# Altium PCB PCB2.PcbDoc
Units mil, origin at the board's own origin, x right, y up, seen from the top; angles counter-clockwise.
Board outline 1574.8 x 1181.1 mil, 6 copper layers (Component Side, Ground Plane (GND), Inner Layer 1, Inner Layer 2, Power Plane (VCC), Solder Side), stack 51.068 mil thick; 48 components, 39 nets, 169 pads, 0 vias.
Unrouted connection lines stored in the file: 114.
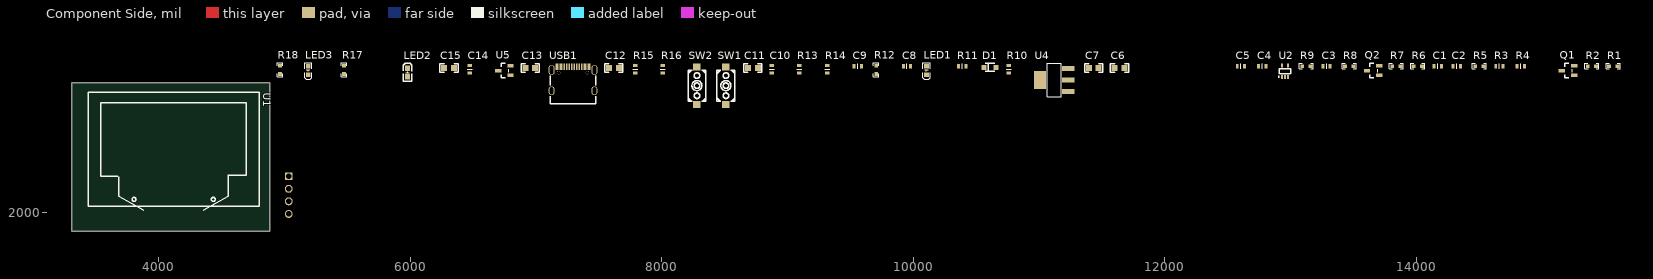
[diagram p0: Component Side view]
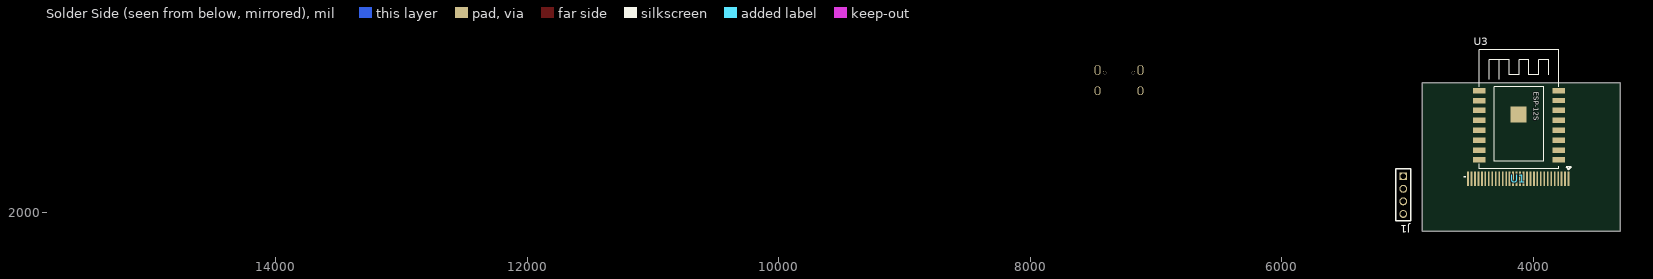
[diagram p1: Solder Side view, seen from below]
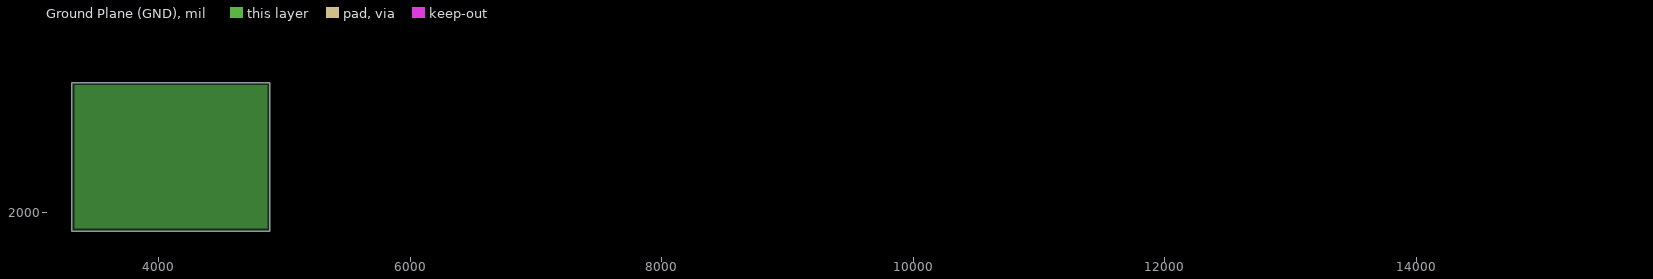
[diagram p2: Ground Plane (GND), clearances drawn from the general rule]
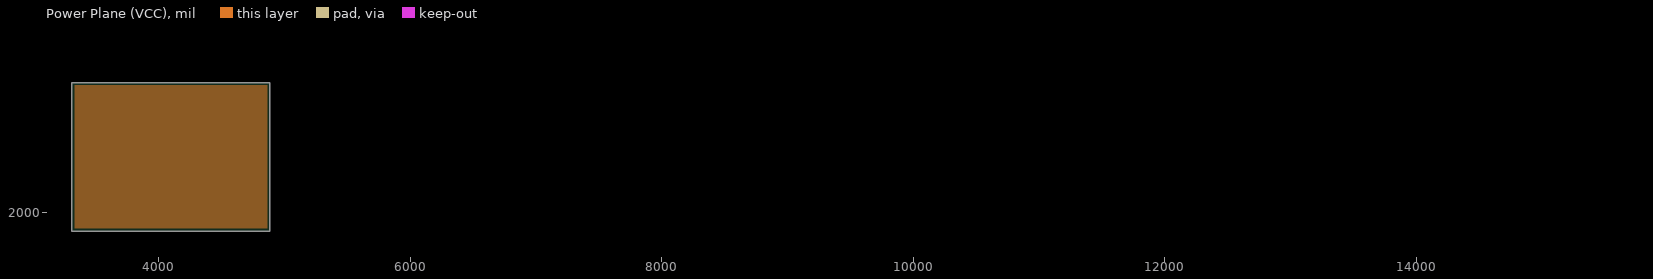
[diagram p3: Power Plane (VCC), clearances drawn from the general rule]

## Layer stack, top to bottom
Top Solder: solder mask 0.4, Solder Resist, Dk 3.5
Component Side: signal copper 1.4
Dielectric 1: core 12.6, FR-4, Dk 4.8
Ground Plane (GND): plane copper 1.417
Dielectric 3: prepreg 5, Dk 4.2
Inner Layer 1: signal copper 1.417
Dielectric 6: core 10, Dk 4.2
Inner Layer 2: signal copper 1.417
Dielectric 5: prepreg 5, Dk 4.2
Power Plane (VCC): plane copper 1.417
Dielectric 4: core 10, Dk 4.2
Solder Side: signal copper 1.4
Bottom Solder: solder mask 0.4, Solder Resist, Dk 3.5

## Board outline
3310,1848.9 3310,3030 4884.8,3030 4884.8,1848.9

## Design rules (kind name [scope] priority, off if disabled: settings)
Clearance [All] p1: gap=5
PlaneClearance [All] p1: clearance=20
PlaneConnect [All] p1: planeconnectstyle=Relief reliefexpansion=20 reliefentries=4 reliefconductorwidth=10 reliefairgap=10
PolygonConnect [All] p1: connectstyle=Relief reliefconductorwidth=10 reliefentries=4 polygonreliefangle="90 Angle" airgapwidth=10
RoutingVias [All] p1: holewidth=28 width=50 viastyle="Through Hole" minholewidth=28 minwidth=50 maxholewidth=28 maxwidth=50
SolderMaskExpansion [All] p1: expansion=4
Width [InNet('D+')] p1: maxlimit=100 minlimit=4 preferedwidth=10 toplayer_prefwidth=4.5 midlayer1_minwidth=10 midlayer1_maxwidth=10 midlayer2_minwidth=10 midlayer2_maxwidth=10 bottomlayer_prefwidth=4.5 minimp=50.000000 maximp=50.000000 favimp=50.000000
28 further rules are at their usual default settings.

## Components (designator, comment, footprint, x,y, rotation, side; value= is the part's Value field where it differs from the comment)
C1 "1u" 0603C-3D 14170,3160 r0 top
C2 "1u" 0603C-3D 14320,3160 r0 top
C3 "1u" 0603C-3D 13285,3160 r0 top
C4 "1u" 0603C-3D 12775,3160 r0 top
C5 "2.2u" 0603C-3D 12605,3160 r0 top
C6 "10uF" C0805 11640,3145 r0 top
C7 "10uF" C0805 11435,3145 r0 top
C8 "4.7u" 0603C-3D 9950,3160 r0 top
C9 "2.2u" 0603C-3D 9560,3160 r0 top
C10 "4.7u" 0603C-3D 8875,3135 r90 top
C11 "100nF" C0805 8725,3145 r0 top
C12 "100nF" C0805 7620,3145 r0 top
C13 "10nf" C0805 6955,3145 r0 top
C14 "1u" 0603C-3D 6475,3135 r90 top
C15 "100nF" C0805 6310,3145 r0 top
D1 "1N4148WS" SOD-323_L1.8-W1.3-LS2.5-RD 10610,3150 r0 top
J1 "通用针序" "PCBComponent_1 - duplicate" 5035,2135 r270 bottom
LED1 "GREEN" LED0603-RD 10105,3125 r90 top
LED2 "red" LED0603-R-RD 5980,3110 r90 top
LED3 "green" LED0603-RD 5190,3125 r90 top
Q1 "8050SG-D-AE3-R" SOT-23-3_L2.9-W1.3-P1.90-LS2.4-TR 15205,3125 r0 top
Q2 "8050SG-D-AE3-R" SOT-23-3_L2.9-W1.3-P1.90-LS2.4-TR 13655,3125 r0 top
R1 "10K" R0603 15565,3160 r0 top
R2 "10K" R0603 15395,3160 r0 top
R3 "32K" 0603R-3D 14660,3160 r0 top
R4 "220K" 0603R-3D 14830,3160 r0 top
R5 "10K" R0603 14500,3160 r0 top
R6 "10K" R0603 14010,3160 r0 top
R7 "10K" R0603 13840,3160 r0 top
R8 "10K" R0603 13465,3160 r0 top
R9 "10K" R0603 13125,3160 r0 top
R10 "4.7K" 0603R-3D 10760,3135 r90 top
R11 "620K" 0603R-3D 10390,3160 r0 top
R12 "10K" R0603 9705,3130 r90 top
R13 "4.7K" 0603R-3D 9095,3135 r90 top
R14 "4.7K" 0603R-3D 9315,3135 r90 top
R15 "4.7K" 0603R-3D 7790,3135 r90 top
R16 "4.7K" 0603R-3D 8010,3135 r90 top
R17 "1K" R0603 5475,3130 r90 top
R18 "1K" R0603 4965,3130 r90 top
SW1 "K2-1107ST-A4SW-06" KEY-SMD_L6.2-W3.6-LS8.0 8510,3005 r90 top
SW2 "K2-1107ST-A4SW-06" KEY-SMD_L6.2-W3.6-LS8.0 8280,3005 r90 top
U1 "OLED-30Pin" 1.3-OLED 3166.59,3036.45 r0 top
U2 "ME6211C33R5G" SOT-353_L2.1-W1.3-P0.65-LS2.3-BL 12955,3120 r0 top
U3 "ESP-12S" WIRELM-SMD_ESP-12S 4115,2690 r180 bottom
U4 "3.3v稳压芯片" SOT-223_L6.5-W3.5-P2.30-LS7.0-BR 11120,3050 r0 top
U5 "ME6211A33M3G-N" SOT-23-3_L2.9-W1.3-P1.90-LS2.4-BR 6750,3125 r0 top
USB1 "KH-TYPE-C-16P" USB-C-SMD_KH-TYPE-C-16P 7295,3060 r0 top

## Footprints (in the part's own frame and the unit in brackets; to place one, negate y for a bottom-side part, rotate by r counter-clockwise, add the part's x,y. Pads: shape width x height; smd on the part's side, far side on the other; paste and mask are expansions set on the pad)
1.3-OLED [mm]
  rect 0.351x3 smd far side: 1(14.079,-19.6) 2(14.783,-19.597) 3(15.484,-19.597) 4(16.183,-19.597) 5(16.884,-19.597) 6(17.585,-19.597) 7(18.283,-19.597) 8(18.984,-19.597) 9(19.683,-19.597) 10(20.384,-19.597) 11(21.082,-19.597) 12(21.783,-19.597) 13(22.484,-19.597) 14(23.183,-19.597) 15(23.884,-19.597) 16(24.582,-19.597) 17(25.283,-19.597) 18(25.984,-19.597) 19(26.683,-19.597) 20(27.384,-19.597) 21(28.082,-19.597) 22(28.784,-19.597) 23(29.485,-19.597) 24(30.183,-19.597) 25(30.884,-19.597) 26(31.583,-19.597) 27(32.284,-19.597) 28(32.977,-19.597) 29(33.678,-19.595) 30(34.377,-19.595)
  silkscreen extent 6.97,-25.91 41.47,-2.11
0603C-3D [mil]
  rect 23.6x35.4 smd: 1(-29.5,0) 2(29.5,0)
  silkscreen extent 0,-20 0,20
0603R-3D [mil]
  rect 23.6x35.4 smd: 1(-29.5,0) 2(29.5,0)
  silkscreen extent 0,-20 0,20
C0805 [mm]
  rect 1.2x1.27 smd: 1(-0.99,0.005) 2(0.99,-0.005)
  silkscreen extent -1.85,-0.89 1.83,0.91, body extent -1.01,-0.61 0.99,0.64, height 0.78
KEY-SMD_L6.2-W3.6-LS8.0 [mm]
  rect 1.4x1.5 smd: 1(3.8,0) 2(-3.8,0)
  silkscreen extent -3.1,-1.8 3.1,1.8
LED0603-R-RD [mil]
  rect 43x39 smd: 1(-33.5,0) 2(33.5,0)
  silkscreen extent -70,-34 72,34
LED0603-RD [mm]
  rect 0.9x1 smd: 1(-0.85,0) 2(0.85,0)
  silkscreen extent -1.75,-0.75 1.55,0.75
"PCBComponent_1 - duplicate" [mm]
  rect 1.524x1.524 hole 1.1: 1(-3.81,0)
  round 1.6 hole 1.1: 2(-1.27,0) 3(1.27,0) 4(3.81,0)
  silkscreen extent -5.31,-1.5 5.19,1.5
R0603 [mil]
  rect 30x30 smd: 1(-33.16,0.03) 2(33.16,-0.03)
  silkscreen extent -55,-22 55,22, body extent -32,-15 31,16, height 18
SOD-323_L1.8-W1.3-LS2.5-RD [mm]
  rect 1x1 smd: 1(-1.2,0) 2(1.2,0)
  silkscreen extent -1,-0.8 1,0.8
SOT-23-3_L2.9-W1.3-P1.90-LS2.4-BR [mm]
  rect 1.25x0.7 smd: 1(1.25,-0.95) 2(1.25,0.95) 3(-1.25,0)
  silkscreen extent -0.65,-1.46 0.9,1.46
SOT-23-3_L2.9-W1.3-P1.90-LS2.4-TR [mm]
  rect 1.25x0.7 smd: 1(1.25,0.95) 2(1.25,-0.95) 3(-1.25,0)
  silkscreen extent -0.65,-1.46 0.9,1.46
SOT-223_L6.5-W3.5-P2.30-LS7.0-BR [mm]
  rect 2.465x1.05 smd: 1(2.857,-2.3) 2(2.857,0) 3(2.857,2.3)
  rect 2.465x3.54 smd: 4(-2.857,0)
  silkscreen extent -1.4,-3.4 1.4,3.4
SOT-353_L2.1-W1.3-P0.65-LS2.3-BL [mm]
  rect 0.4x0.8 smd: 1(-0.65,-1.15) 2(0,-1.15) 3(0.65,-1.15) 4(0.65,1.15) 5(-0.65,1.15)
  silkscreen extent -1.4,-1.27 1.14,0.51
USB-C-SMD_KH-TYPE-C-16P [mm]
  oval 1.2x2 hole 0.7 slot 1.7 at 90 deg: 1(-4.32,1.765) 2(4.32,1.765)
  oval 1.2x1.8 hole 0.7 slot 1.4 at 90 deg: 3(-4.32,-2.415) 4(4.32,-2.415)
  rect 0.3x1.3 smd: A1(-3.35,2.415) A4(-2.55,2.415) A5(-1.25,2.415) A6(-0.25,2.415) A7(0.25,2.415) A8(1.25,2.415) A9(2.55,2.415) A12(3.35,2.415) B1(3.05,2.415) B4(2.25,2.415) B5(1.75,2.415) B6(0.75,2.415) B7(-0.75,2.415) B8(-1.75,2.415) B9(-2.25,2.415) B12(-3.05,2.415)
  round 0.7 hole 0.7 unplated: ""(-2.89,1.235) ""(2.89,1.235)
  silkscreen extent -4.57,-5.08 4.57,0.57
WIRELM-SMD_ESP-12S [mm]
  rect 2.5x1.1 smd: 1(-8.002,7.002) 2(-8.002,4.991) 3(-8,2.998) 4(-8.001,0.989) 5(-8.002,-1.006) 6(-8.001,-3.002) 7(-8.002,-5.006) 8(-8.001,-7.002) 9(8,-6.996) 10(8,-4.998) 11(8.001,-2.998) 12(8,-0.998) 13(8.001,1.004) 14(8.002,3.004) 15(8,5.002) 16(8,7.002)
  rect 3.2x3.2 smd: 17(-0.128,2.176)
  silkscreen extent -8,-8.75 8,15.25

## Part data
LED1 LED3: library part TJ-S1608SW6TGLC2G-A5
LED2: library part OSR50603C1E

## Nets (pads, with @x,y where several pads share a name; then routed paths per layer and width w, separated by ;. In a path a pad name is that pad's centre, name@x,y a point inside that pad or via, vN(x,y) a via of type N, cw(c..) or ccw(c..) an arc to the next point about the centre after c; other vN are vias at no path point)
3.3V: C15.2 R18.2 U5.2
3.3V1: C3.2 C5.2 D1.1 R10.1 R13.2 R14.2 R15.2 U1.6 U1.9 U1.11 U2.5
3.3V2: C7.1 R1.2 R5.2 R6.2 R8.2 R12.1 U3.8 U4.2 U4.4
5V1: C4.2 C6.1 C14.2 J1.2 R17.2 U2.1 U2.3 U4.3 U5.3 USB1.A4 USB1.A9 USB1.B4 USB1.B9
ADC: R3.2 R4.1 U3.2
"ADC EX": R4.2
D+: USB1.A6 USB1.B6
D-: USB1.A7 USB1.B7
DTR: Q1.1 R7.1
EN: Q2.3 R5.1 U3.3
GND1: C3.1 C4.1 C5.1 C6.2 C7.2 C8.1 C9.2 C10.1 C11.2 C12.2 C13.2 C14.1 C15.1 J1.1 LED1.1 LED2.2 R3.1 R9.2 R11.1 R16.1 SW1.2 SW2.2 U1.1 U1.8 U1.10 U1.12 U1.13 U1.16 U1.17 U1.21 U1.22 U1.23 U1.24 U1.25 U1.29 U1.30 U2.2 U3.9 U4.1 U5.1 USB1.A1 USB1.A12 USB1.B1 USB1.B12
IO0: C11.1 Q1.3 R6.1 SW1.1 U3.12
IO2: R8.1 U3.11
IO4: J1.4 R14.1 U1.19 U1.20 U3.13
IO5: J1.3 R13.1 U1.18 U3.14
IO12: U3.6
IO13: U3.7
IO14: U3.5
IO15: R9.1 U3.10
IO16: U3.4
NetC1_1: C1.1 U1.5
NetC1_2: C1.2 U1.4
NetC2_1: C2.1 U1.3
NetC2_2: C2.2 U1.2
NetC8_2: C8.2 U1.27
NetC9_1: C9.1 U1.28
NetC10_2: C10.2 D1.2 R10.2 U1.14
NetC13_1: C13.1
NetLED1_2: LED1.2 R12.2
NetLED2_1: LED2.1 R17.1
NetLED3_2: LED3.2 R18.1
NetQ1_2: Q1.2 R2.2
NetQ2_2: Q2.2 R7.2
NetR11_2: R11.2 U1.26
NetR15_1: R15.1 R16.2 U1.15
RST: C12.1 R1.1 SW2.1 U3.1
RTS: Q2.1 R2.1
RX: LED3.1 U3.15
TX: U3.16
pads on no net: U1.7 U2.4 U3.17 USB1. USB1.1 USB1.2 USB1.3 USB1.4 USB1.A5 USB1.A8 USB1.B5 USB1.B8

## Polygon pours and split planes (outlines as drawn)
no net on Ground Plane (GND) (split plane): 4864.71,1868.99 3330.1,1868.99 3330.1,3009.9 4864.71,3009.9
no net on Power Plane (VCC) (split plane): 4864.71,1868.99 3330.1,1868.99 3330.1,3009.9 4864.71,3009.9